# Altium PCB sigclock.PcbDoc
Units mm, origin at the board's own origin, x right, y up, seen from the top; angles counter-clockwise.
Board outline 66.5 x 27 mm, 2 copper layers (Top Layer, Bottom Layer), stack 1.214 mm thick; 8 components, 15 nets, 52 pads, 6 vias.
Unrouted connection lines stored in the file: 1.
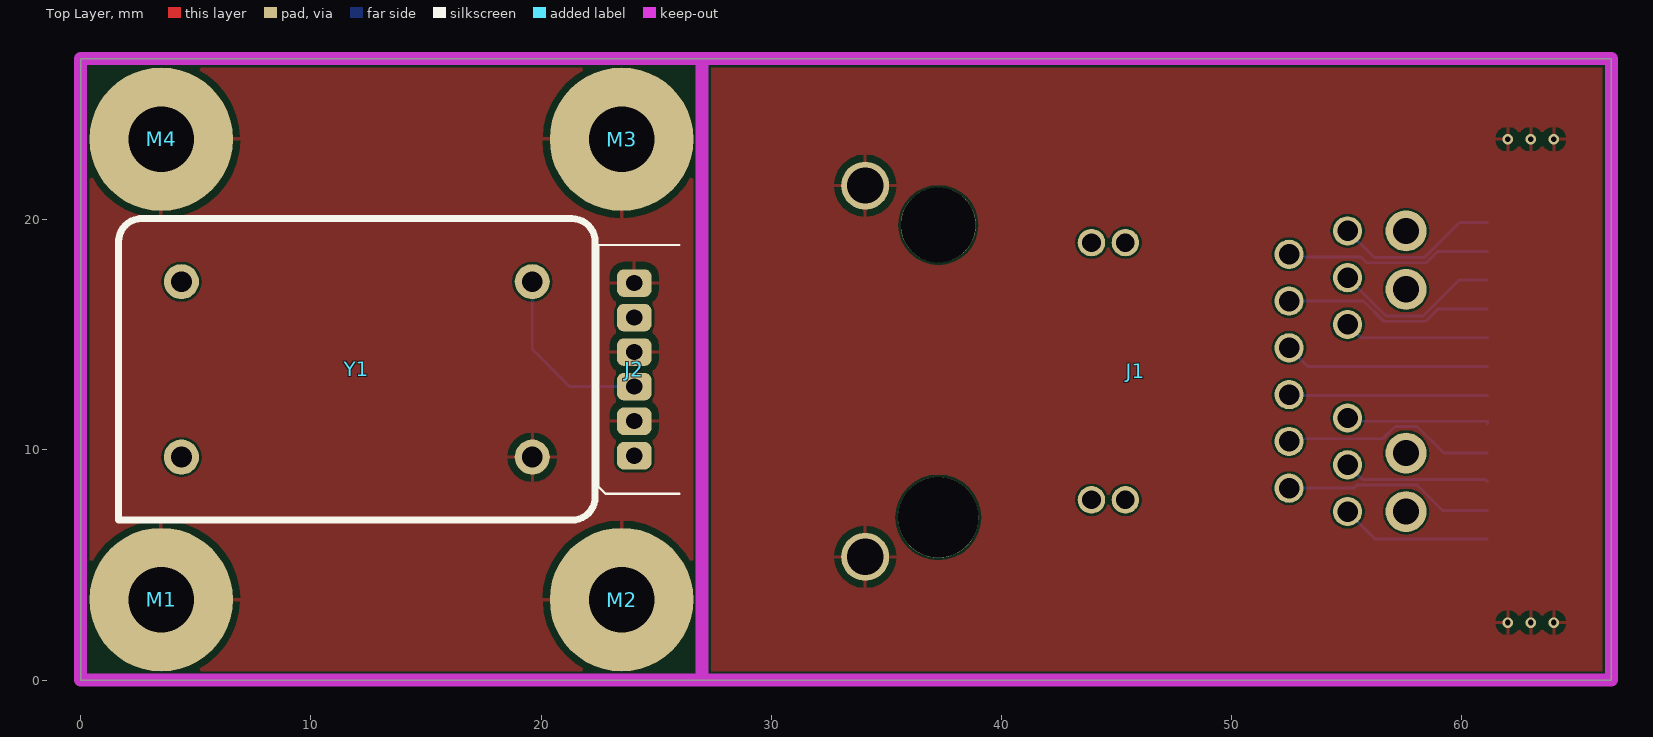
[diagram p0: Top Layer view]
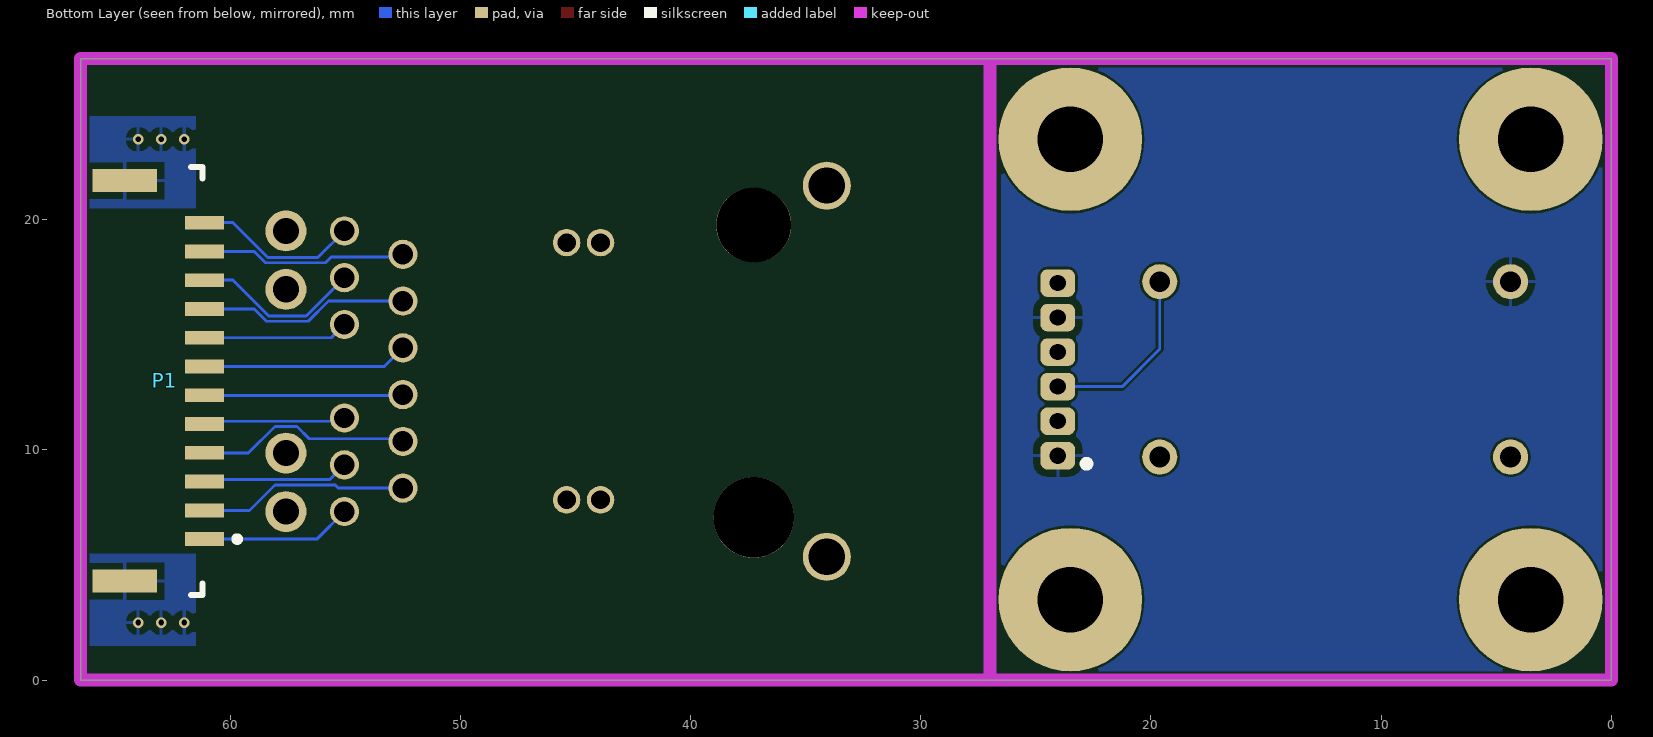
[diagram p1: Bottom Layer view, seen from below]

## Layer stack, top to bottom
Top Solder: solder mask 0.0102, Solder Resist, Dk 3.5
Top Layer: signal copper 0.0356
Dielectric1: core 1.143, FR-4, Dk 4.8
Bottom Layer: signal copper 0.0356
Bottom Solder: solder mask 0.0102, Solder Resist, Dk 3.5

## Board outline
0,0 66.5,0 66.5,27 0,27

## Design rules (kind name [scope] priority, off if disabled: settings)
Clearance [All] p1: gap=0.102 ignorepadtopadclearanceinfootprint=FALSE except(0.203: Arc-THPad Arc-Hole Track-THPad Track-Hole)
ComponentClearance [All] p1 off: gap=0.254 collisioncheckmode=3 verticalgap=0.254 showdistances=FALSE
HoleSize [All] p1: absolutevalues=TRUE maxlimit=25.4 minlimit=0.254 maxpercent=80.000 minpercent=20.000
PolygonConnect [All] p1: connectstyle=Relief reliefconductorwidth=0.152 reliefentries=4 polygonreliefangle="90 Angle" airgapwidth=0.305
RoutingVias [All] p1: holewidth=0.711 width=1.27 viastyle="Through Hole" minholewidth=0.711 minwidth=1.27 maxholewidth=0.711 maxwidth=1.27
SilkToSolderMaskClearance SilkscreenOverComponentPads [IsPad] p1: minsilkscreentomaskgap=0.254 clearancetoexposedcopper=TRUE
SolderMaskExpansion [All] p1: expansion=0.102
Width [All] p1: maxlimit=500 minlimit=0.102 preferedwidth=0.102
27 further rules are at their usual default settings.

## Components (designator, comment, footprint, x,y, rotation, side; value= is the part's Value field where it differs from the comment)
J1 "0826-1X1T-GH-F" 0826 37.26,13.42 r90 top
J2 "S6B-ZR" S6B-ZR 24.5,13.5 r270 top
M1 "MOUNT350" mount350 3.5,3.5 r0 top
M2 "MOUNT350" mount350 23.5,3.5 r0 top
M3 "MOUNT350" mount350 23.5,23.5 r0 top
M4 "MOUNT350" mount350 3.5,23.5 r0 top
P1 "SM14B-GHS-TB" SM12B-GHS-TBT 63.5,13 r90 bottom
Y1 "OX-400-0047-40M00" G125 12,13.5 r180 top

## Footprints (in the part's own frame and the unit in brackets; to place one, negate y for a bottom-side part, rotate by r counter-clockwise, add the part's x,y. Pads: shape width x height; smd on the part's side, far side on the other; paste and mask are expansions set on the pad)
0826 [mil] "Bel-Fuse Gigabit MagJack with PoE footprint"
  round 50 hole 35: 1(-200,-600) 2(-120,-600) 3(-40,-600) 4(40,-600) 5(120,-600) 6(200,-600) 7(-240,-700) 8(-160,-700) 9(-80,-700) 10(80,-700) 11(160,-700) 12(240,-700)
  round 47 hole 32: 13(-220,-320) 14(220,-320) 15(-220,-262) 16(220,-262)
  round 70 hole 45: 17(-240,-800) 18(-140,-800) 19(140,-800) 20(240,-800)
  round 82 hole 62: 21(-317.5,125) 22(317.5,125)
  round 137.8 hole 137.8 unplated: M1(-250,0)
  round 128 hole 128 unplated: M2(250,0)
  body extent -321,-860 321,430, height 536
G125 [mil] "Vectron 4-pin OCXO package"
  round 60 hole 35.43: 1(300,150) 7(-300,150) 8(-300,-150) 14(300,-150)
  silkscreen extent -407,-258 407,258, body extent -407,-258 407,258, height 335
mount350 [mil]
  round 245.59 hole 112: 1(0,0)
S6B-ZR [mm] "1.5mm pitch right angle 6-position"
  rrect50% 1.2x1.5 hole 0.7 paste-1.5 mask+0.05: 1(3.75,-0.45) 2(2.25,-0.45) 3(0.75,-0.45) 4(-0.75,-0.45) 5(-2.25,-0.45) 6(-3.75,-0.45)
  silkscreen extent -5.4,-2 5.4,1.5, body extent -5.25,-1.85 5.25,4.15, height 3.7
SM12B-GHS-TBT [mm] "Side Entry Shrouded Connector"
  rect 0.6x1.7 smd: 1(-6.875,-2.375) 2(-5.625,-2.375) 3(-4.375,-2.375) 4(-3.125,-2.375) 5(-1.875,-2.375) 6(-0.625,-2.375) 7(0.625,-2.375) 8(1.875,-2.375) 9(3.125,-2.375) 10(4.375,-2.375) 11(5.625,-2.375) 12(6.875,-2.375)
  rect 1x2.8 smd: 13(8.697,1.075) 14(-8.697,1.075)
  silkscreen extent -9.3,-3.93 9.3,-1.8, body extent -9.12,-2.72 9.13,2.13, height 4.58

## Part data
J1: "Gigabit Ethernet 35W PoE MAGJACK", Manufacturer=Bel-Fuse, Do Not Place=DNP, Manufacturer P/N=0826-1X1T-GH-F
J2: "1.5mm pitch right angle 6-position", Manufacturer=JST, Manufacturer P/N=S6B-ZR
M1 M2 M3 M4: library part M3_HOLE
P1: library part BM12B-GHS-TBT, "Right Entry Shrouded Connector; 12-position", Manufacturer=JST, Manufacturer P/N=SM12B-GHS-TB
Y1: "Oven Controlled Precision Oscillator, 10MHz", Manufacturer=Vectron, Manufacturer P/N=OX-400-0047-40M00

## Via types
v1: diameter 0.457, hole 0.254, Top Layer to Bottom Layer, 6 vias

## Nets (pads, with @x,y where several pads share a name; then routed paths per layer and width w, separated by ;. In a path a pad name is that pad's centre, name@x,y a point inside that pad or via, vN(x,y) a via of type N, cw(c..) or ccw(c..) an arc to the next point about the centre after c; other vN are vias at no path point)
CLK-40: J2.3 Y1.8 | length 8.5
  Bottom Layer w0.127: Y1.8 19.62,14.38 21.25,12.75 J2.3 J2.3@24.55,12.75
GND: J1.21 J1.22 J2.2 J2.4 J2.6 M1.1 M2.1 M3.1 M4.1 P1.13 P1.14 Y1.7
  other v1: 62,2.5 63,2.5 64,2.5 62,23.5 63,23.5 64,23.5
MDI0_C: J1.12 P1.12 | length 7.2
  Bottom Layer w0.127: J1.12 56.196,18.36 58.371,18.36 59.885,19.875 P1.12
MDI0_N: J1.10 P1.8 | length 6.3
  Bottom Layer w0.127: J1.10 55.617,14.875 P1.8
MDI0_P: J1.11 P1.10 | length 7.4
  Bottom Layer w0.127: J1.11 56.704,15.82 58.331,15.82 59.885,17.375 P1.10
MDI1_C: J1.6 P1.11 | length 9
  Bottom Layer w0.127: J1.6 52.614,18.386 55.614,18.386 55.868,18.132 58.465,18.132 58.958,18.625 P1.11
MDI1_N: J1.5 P1.9 | length 9.2
  Bottom Layer w0.127: J1.5 55.733,16.468 56.609,15.592 58.425,15.592 58.958,16.125 P1.9
MDI1_P: J1.4 P1.7 | length 9
  Bottom Layer w0.127: J1.4 53.311,13.625 P1.7
MDI2_C: J1.1 P1.2 | length 9.1
  Bottom Layer w0.127: J1.1 52.51,8.35 55.309,8.35 55.439,8.48 58.059,8.48 59.163,7.375 P1.2
MDI2_N: J1.2 P1.4 | length 9.4
  Bottom Layer w0.127: J1.2 52.614,10.486 56.568,10.486 57.101,11.02 58.059,11.02 59.203,9.875 P1.4
MDI2_P: J1.3 P1.6 | length 8.6
  Bottom Layer w0.127: J1.3 52.529,12.375 P1.6
MDI3_C: J1.7 P1.1 | length 6.6
  Bottom Layer w0.127: J1.7 56.239,6.125 P1.1
MDI3_N: J1.9 P1.5 | length 6.3
  Bottom Layer w0.127: J1.9 55.18,11.248 61.125,11.248 P1.5
MDI3_P: J1.8 P1.3 | length 6.4
  Bottom Layer w0.127: J1.8 55.688,8.708 61.042,8.708 P1.3
V5: J2.1 J2.5 Y1.14
pads on no net: J1.13 J1.14 J1.15 J1.16 J1.17 J1.18 J1.19 J1.20 J1.M1 J1.M2 Y1.1

## Polygon pours and split planes (outlines as drawn)
GND on Top Layer "TOP_GND" (solid, pour order 0): 66.5,0 66.5,27 0,27 0,0
GND on Bottom Layer "BOT_GND" (solid, pour order 6): 66.5,5.5 66.5,1.5 61.5,1.5 61.5,5.5
GND on Bottom Layer "BOT_GND" (solid, pour order 4): 66.5,20.5 66.5,24.5 61.5,24.5 61.5,20.5
V5 on Bottom Layer "BOT_V5" (solid, pour order 2): 26.5,0 26.5,27 0,27 0,0

## Keep-outs
Keep-Out Layer:
  lines w0.559: 26.5,0 66.5,0 66.5,27 26.5,27 ; 27,0 27,27 ; 30,0 0,0 0,27 30,27

## Silkscreen, mask and mechanical layers (free items; w line width, h text height)
Mechanical 2:
  lines w0.508: 27,0 27,27 ; 0,0 0,27 26.5,27 66.5,27 66.5,0 26.5,0 0,0
Mechanical 10:
  text "1. FRONT ASSEMBLY NOTE #1" at 53.34,132.08 h1.14
Mechanical 11:
  text "1. FRONT CONFORMAL COAT NOTE #1" at 53.34,132.08 h1.14
Mechanical 16:
  lines w0.127: -58,-3.025 -52.92,-3.025 ; -58,50.95 -52.92,50.95 ; -58,104.925 -52.92,104.925 ; 11.85,-57 11.85,-51.92 ; 11.85,153.82 11.85,158.9 ; 30.9,-51.92 30.9,-21.44 66.46,-21.44 ; 30.9,-30.584 66.46,-30.584 ; 32.17,-33.886 42.33,-33.886 ; 37.631,-40.998 38.393,-40.998 ; 37.631,-40.363 38.393,-40.363 ; 37.631,-38.458 38.393,-38.458 ; 37.631,-37.823 38.393,-37.823 ; 37.631,-35.918 38.393,-35.918 ; 37.631,-35.283 38.393,-35.283 ; 81.7,-57 81.7,-51.92 ; 81.7,153.82 81.7,158.9 ; 102.02,-44.3 216.32,-44.3 ; 102.02,-36.68 216.32,-36.68 ; 102.02,-29.06 140.12,-29.06 ; 102.02,143.66 216.32,143.66 ; 102.02,148.74 216.32,148.74 ; 102.02,153.82 102.02,138.58 216.32,138.58 ; 117.26,138.58 117.26,153.82 ; 129.96,138.58 129.96,153.82 ; 140.12,-51.92 140.12,-36.68 140.12,-21.44 ; 151.55,-57 151.55,-51.92 ; 151.55,153.82 151.55,158.9 ; 193.46,-51.92 193.46,-36.68 ; 200.445,138.58 200.445,153.82 ; 216.32,-3.025 221.4,-3.025 ; 216.32,50.95 221.4,50.95 ; 216.32,104.925 221.4,104.925 ; 66.46,-21.44 102.02,-21.44 ; 66.46,-21.44 66.46,-51.92 102.02,-51.92 ; 102.02,-51.92 216.32,-51.92 ; 102.02,-51.92 102.02,-21.44 ; 102.02,-21.44 140.12,-21.44 ; 140.12,-21.44 216.32,-21.44 216.32,-51.92 ; 216.32,-51.92 -52.92,-51.92 -52.92,153.82 216.32,153.82 216.32,-51.92 ; -58,-57 221.4,-57 221.4,158.9 -58,158.9 -58,-57
  lines w0.178: 38.012,-40.744 38.012,-39.982 ; 38.012,-38.204 38.012,-37.442 ; 38.012,-35.664 38.012,-34.902
  text "1" at -23.676,155.471 h1.78
  text "2" at 46.191,155.471 h1.78
  text "3" at 115.914,155.471 h1.78
  text "4" at 185.789,155.471 h1.78
  text "REV" at 103.29,150.01 h1.7
  text "DATE" at 118.53,150.01 h1.7
  text "DESC" at 131.23,150.01 h1.7
  text "ENG" at 202.35,150.01 h1.7
  text "1" at 103.29,144.93 h1.7
  text "*" at 118.53,144.93 h1.7
  text "INITIAL RELEASE" at 131.23,144.93 h1.7
  text "*" at 202.35,144.93 h1.7
  text "A" at -56.095,129.614 h1.78
  text "A" at 218.225,129.614 h1.78
  text "B" at -56.095,75.639 h1.78
  text "B" at 218.225,75.639 h1.78
  text "C" at -56.095,21.664 h1.78
  text "C" at 218.225,21.664 h1.78
  text "ENGINEER:" at 103.29,-23.98 h1.14
  text "TITLE:" at 141.39,-23.98 h1.14
  text "Signal Laboratories, Inc." at 69,-25 h1.78
  text "ALL DIMENSIONS ARE IN MM (INCHES)" at 32.805,-25.885 h1.2
  text "*" at 103.29,-27.155 h1.78
  text "3479 Edison Way" at 69,-30 h1.78
  text "TOLERANCES:" at 43.854,-30.076 h1.2
  text "*" at 142.025,-30.965 h2.2
  text "PCB DESIGNER:" at 103.29,-31.473 h1.14
  text "D" at -56.095,-32.184 h1.78
  text "D" at 218.225,-32.184 h1.78
  text "DECIMALS" at 32.805,-32.87 h1.2
  text "*" at 103.29,-34.775 h1.78
  text "Menlo Park CA 94025" at 69,-35 h1.78
  text ".X     0.1" at 32.805,-36.045 h1.2
  text ".XX    0.05" at 32.805,-38.585 h1.2
  text "DATE:" at 103.29,-39.22 h1.14
  text "PART NO.:" at 141.39,-39.22 h1.14
  text "REV:" at 194.73,-39.22 h1.14
  text "(877) 778-8435" at 69,-40 h1.78
  text ".XXX   0.005" at 32.805,-41.125 h1.2
  text "*" at 103.29,-42.395 h1.7
  text "-" at 141.39,-42.395 h1.78
  text "1" at 194.73,-42.395 h1.78
  text "siglabs.com" at 69,-45 h1.78
  text "*UNLESS OTHERWISE NOTED" at 32.17,-46.84 h1.2
  text "FILE NAME:" at 103.29,-46.84 h1.14
  text "DWG NO:" at 141.39,-46.84 h1.14
  text "SCALE:" at 194.73,-46.84 h1.14
  text ".PCB_FILE_NAME_NO_PATH" at 104.56,-49.888 h1.78
  text "-" at 141.39,-50.015 h1.78
  text "1:1" at 194.73,-50.015 h1.78
  text "1" at -23.676,-55.349 h1.78
  text "2" at 46.191,-55.349 h1.78
  text "3" at 115.914,-55.349 h1.78
  text "4" at 185.789,-55.349 h1.78
Drill Drawing:
  text "1. LEAD-FREE HASL" at 53.34,132.08 h1.14
  text "2. SOLDERMASK: GREEN" at 53.34,129.54 h1.14
  text "3. SILKSCREEN: WHITE" at 53.34,127 h1.14
  text ".Legend" at 102.235,111.76 h1.2
Mechanical 26:
  text "1. BOTTOM ASSEMBLY NOTE #1" at 101.6,134.62 h1.14
Mechanical 27:
  text "1. BOTTOM CONFORMAL COAT NOTE #1" at 101.6,132.715 h1.14
Mechanical 32:
  lines w0.127: -58,-3.025 -52.92,-3.025 ; -58,50.95 -52.92,50.95 ; -58,104.925 -52.92,104.925 ; -52.92,-44.3 61.38,-44.3 ; -52.92,-36.68 61.38,-36.68 ; -52.92,138.58 61.38,138.58 61.38,153.82 ; -52.92,143.66 61.38,143.66 ; -52.92,148.74 61.38,148.74 ; -37.045,138.58 -37.045,153.82 ; -30.06,-51.92 -30.06,-36.68 ; 11.85,-57 11.85,-51.92 ; 11.85,153.82 11.85,158.9 ; 23.28,-51.92 23.28,-36.68 23.28,-21.44 ; 23.28,-29.06 61.38,-29.06 ; 33.44,138.58 33.44,153.82 ; 46.14,138.58 46.14,153.82 ; 81.7,-57 81.7,-51.92 ; 81.7,153.82 81.7,158.9 ; 96.94,-30.584 132.5,-30.584 ; 121.07,-33.886 131.23,-33.886 ; 125.007,-40.998 125.769,-40.998 ; 125.007,-40.363 125.769,-40.363 ; 125.007,-38.458 125.769,-38.458 ; 125.007,-37.823 125.769,-37.823 ; 125.007,-35.918 125.769,-35.918 ; 125.007,-35.283 125.769,-35.283 ; 132.5,-51.92 132.5,-21.44 96.94,-21.44 ; 151.55,-57 151.55,-51.92 ; 151.55,153.82 151.55,158.9 ; 216.32,-3.025 221.4,-3.025 ; 216.32,50.95 221.4,50.95 ; 216.32,104.925 221.4,104.925 ; -52.92,-51.92 61.38,-51.92 ; -52.92,-51.92 -52.92,-21.44 23.28,-21.44 ; -52.92,-51.92 216.32,-51.92 216.32,153.82 -52.92,153.82 -52.92,-51.92 ; 23.28,-21.44 61.38,-21.44 ; 61.38,-51.92 96.94,-51.92 96.94,-21.44 ; 61.38,-51.92 61.38,-21.44 ; 61.38,-21.44 96.94,-21.44 ; -58,-57 221.4,-57 221.4,158.9 -58,158.9 -58,-57
  lines w0.178: 125.388,-40.744 125.388,-39.982 ; 125.388,-38.204 125.388,-37.442 ; 125.388,-35.664 125.388,-34.902
  text "4" at -22.389,155.471 h1.78
  text "3" at 47.486,155.471 h1.78
  text "2" at 117.209,155.471 h1.78
  text "1" at 187.076,155.471 h1.78
  text "ENG" at -38.95,150.01 h1.7
  text "DESC" at 32.17,150.01 h1.7
  text "DATE" at 44.87,150.01 h1.7
  text "REV" at 60.11,150.01 h1.7
  text "*" at -38.95,144.93 h1.7
  text "INITIAL RELEASE" at 32.17,144.93 h1.7
  text "*" at 44.87,144.93 h1.7
  text "1" at 60.11,144.93 h1.7
  text "A" at -54.825,129.614 h1.78
  text "A" at 219.495,129.614 h1.78
  text "B" at -54.825,75.639 h1.78
  text "B" at 219.495,75.639 h1.78
  text "C" at -54.825,21.664 h1.78
  text "C" at 219.495,21.664 h1.78
  text "TITLE:" at 22.01,-23.98 h1.14
  text "ENGINEER:" at 60.11,-23.98 h1.14
  text "Signal Laboratories, Inc." at 94.4,-25 h1.78
  text "ALL DIMENSIONS ARE IN MM (INCHES)" at 130.595,-25.885 h1.2
  text "*" at 60.11,-27.155 h1.78
  text "3479 Edison Way" at 94.4,-30 h1.78
  text "TOLERANCES:" at 119.546,-30.076 h1.2
  text "*" at 21.375,-30.965 h2.2
  text "PCB DESIGNER:" at 60.11,-31.473 h1.14
  text "D" at -54.825,-32.184 h1.78
  text "D" at 219.495,-32.184 h1.78
  text "DECIMALS" at 130.595,-32.87 h1.2
  text "*" at 60.11,-34.775 h1.78
  text "Menlo Park CA 94025" at 94.4,-35 h1.78
  text ".X     0.1" at 130.595,-36.045 h1.2
  text ".XX    0.05" at 130.595,-38.585 h1.2
  text "REV:" at -31.33,-39.22 h1.14
  text "PART NO.:" at 22.01,-39.22 h1.14
  text "DATE:" at 60.11,-39.22 h1.14
  text "(877) 778-8435" at 94.4,-40 h1.78
  text ".XXX   0.005" at 130.595,-41.125 h1.2
  text "1" at -31.33,-42.395 h1.78
  text "-" at 22.01,-42.395 h1.78
  text "*" at 60.11,-42.395 h1.7
  text "siglabs.com" at 94.4,-45 h1.78
  text "SCALE:" at -31.33,-46.84 h1.14
  text "DWG NO:" at 22.01,-46.84 h1.14
  text "FILE NAME:" at 60.11,-46.84 h1.14
  text "*UNLESS OTHERWISE NOTED" at 131.23,-46.84 h1.2
  text ".PCB_FILE_NAME_NO_PATH" at 58.84,-49.888 h1.78
  text "1:1" at -31.33,-50.015 h1.78
  text "-" at 22.01,-50.015 h1.78
  text "4" at -22.389,-55.349 h1.78
  text "3" at 47.486,-55.349 h1.78
  text "2" at 117.209,-55.349 h1.78
  text "1" at 187.076,-55.349 h1.78